# Altium PCB Rev3.PcbDoc (part 3 of 3)
Units mil, origin at the board's own origin, x right, y up, seen from the top; angles counter-clockwise.
Board outline 3350 x 2700 mil, 4 copper layers (Top Layer, GND, VCC, Bottom Layer), stack 23.756 mil thick; 157 components, 90 nets, 509 pads, 166 vias.
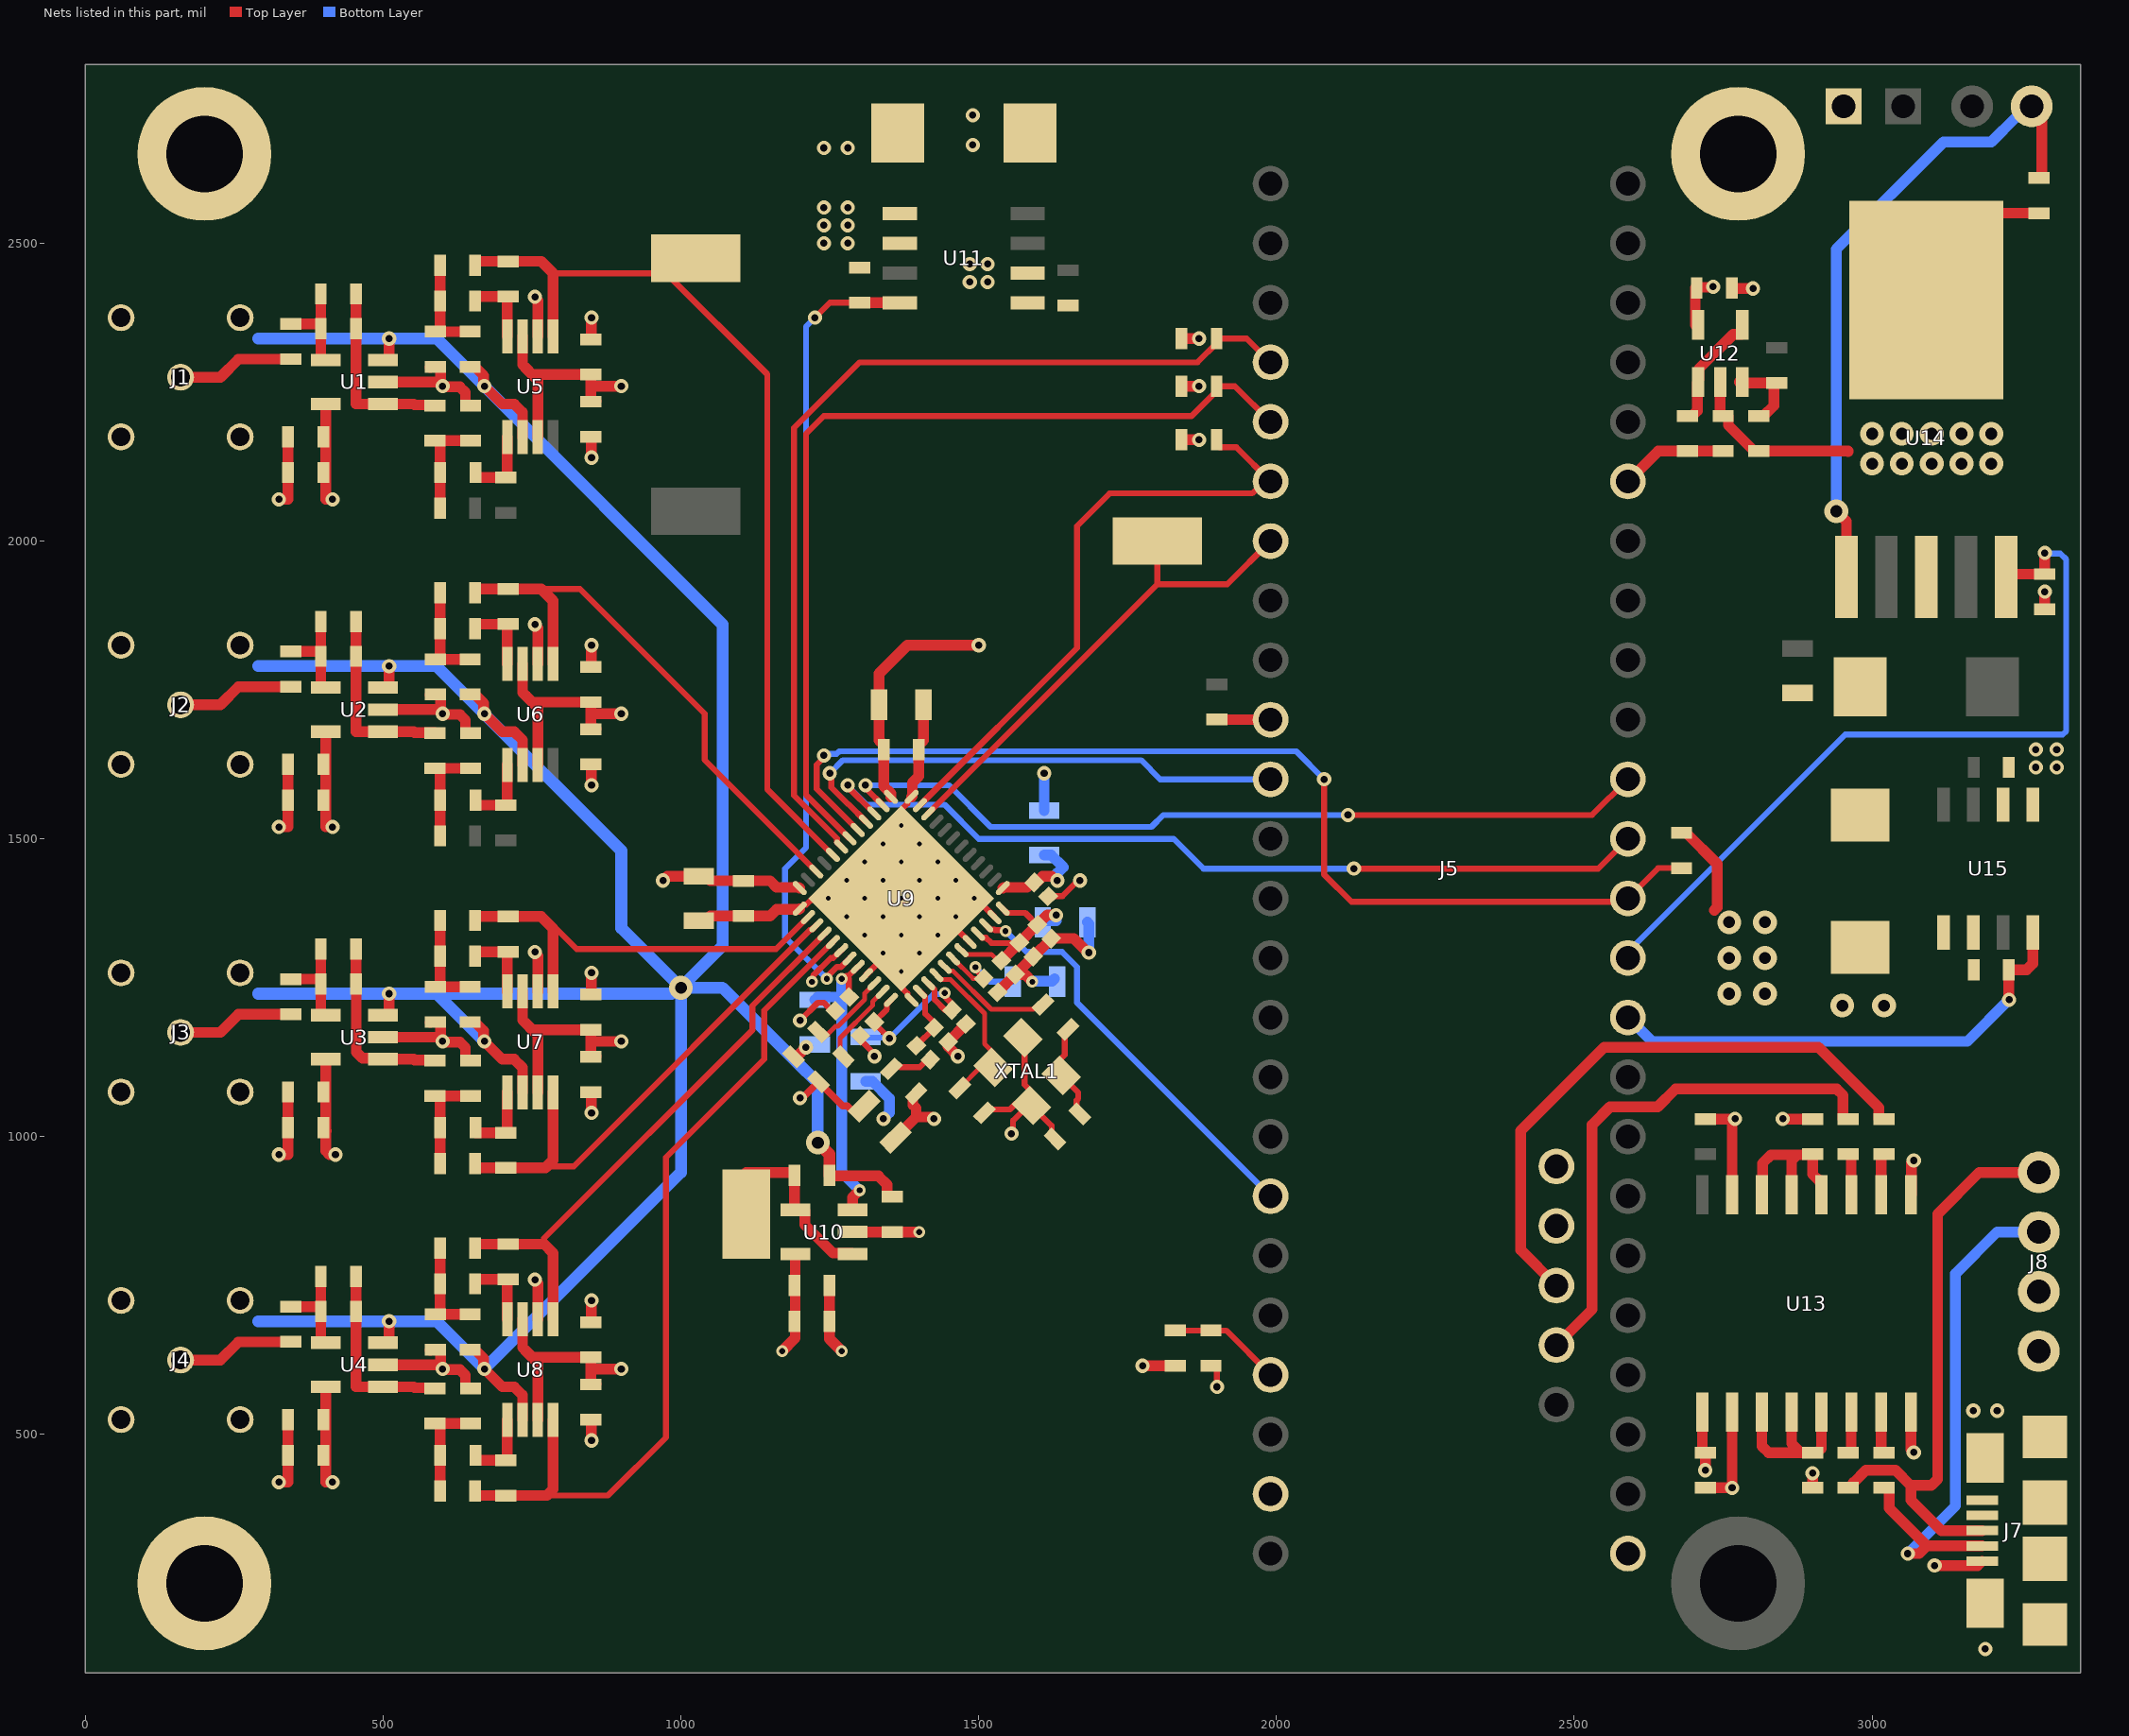
[diagram p4: the nets of this part, all layers, seen from the top]

## Via types
v1: diameter 24, hole 12, Top Layer to Bottom Layer, tented both sides, 101 vias
v2: diameter 40, hole 20, Top Layer to Bottom Layer, tented both sides, 29 vias
v3: diameter 19.68, hole 7.87, Top Layer to Bottom Layer, 25 vias
v4: diameter 20, hole 10, Top Layer to Bottom Layer, tented both sides, 11 vias

## Nets (pads, with @x,y where several pads share a name; then routed paths per layer and width w, separated by ;. In a path a pad name is that pad's centre, name@x,y a point inside that pad or via, vN(x,y) a via of type N, cw(c..) or ccw(c..) an arc to the next point about the centre after c; other vN are vias at no path point) (continued)
AINN3: C21.2 R27.2 U7.4 U9.3 | length 877.2
  Top Layer w10: 775,950 820,950 1217.91,1347.91 1220.48,1347.91 U9.3@1227.33,1354.76
  Top Layer w18: C21.2@654.53,955 654.53,948.31 655.37,947.47 R27.2@706,947.47 772.47,947.47 775,950 785.39,960.39 U7.4@785.39,1074.35
AINN4: C24.2 R28.2 U8.4 U9.5 | length 1447.1
  Top Layer w10: 774.84,397.47 877.47,397.47 975,495 975,965 1140,1130 1140,1211.76 U9.5@1255.16,1326.92
  Top Layer w18: C24.2@654.53,405 654.53,398.31 655.37,397.47 R28.2@706,397.47 774.84,397.47 785.39,408.02 U8.4@785.39,524.35
AINN_BUS1: C13.1 R29.1 TP1.1 U5.5 U9.44 | length 1533.5
  Top Layer w10: 785.39,2449.61 975.39,2449.61 1145,2280 1145,1583.24 U9.44@1255.16,1473.08
  Top Layer w18: C13.1@654.53,2463 654.53,2468.69 655.37,2469.53 R29.1@710,2469.53 765.47,2469.53 785.39,2449.61 U5.5@785.39,2343.65
AINN_BUS2: C16.1 R30.1 U6.5 U9.46 | length 954.8
  Top Layer w10: 765.47,1919.53 830.47,1919.53 1040,1710 1040,1632.56 U9.46@1227.33,1445.24
  Top Layer w18: C16.1@654.53,1913 654.53,1918.69 655.37,1919.53 R30.1@710,1919.53 765.47,1919.53 785.39,1899.61 U6.5@785.39,1793.65
AINN_BUS3: C19.1 R31.1 U7.5 U9.2 | length 732.5
  Top Layer w10: 775,1365 825,1315 1159.73,1315 U9.2@1213.41,1368.68
  Top Layer w18: C19.1@654.53,1363 654.53,1368.69 655.37,1369.53 R31.1@710,1369.53 765.47,1369.53 785.39,1349.61 U7.5@785.39,1243.65
AINN_BUS4: C22.1 R32.1 U8.5 U9.4 | length 970.4
  Top Layer w10: 770.47,819.53 770.47,829.47 1120,1179 1120,1219.6 U9.4@1241.25,1340.84
  Top Layer w18: C22.1@654.53,813 654.53,818.69 655.37,819.53 R32.1@710,819.53 770.47,819.53 785.39,804.61 U8.5@785.39,693.65
AVDD: C2.1 C3.2 C5.1 C6.2 C8.1 C9.2 C11.1 C12.2 C29.2 C30.1 C31.2 C32.1 C33.2 C34.1 C35.2 C36.1 C37.2 C38.1 C40.1 C41.1 C42.2 C44.2 C45.1 C47.2 C52.2 C74.2 R34.2 U1.5 U2.5 U3.5 U4.5 U5.3 U5.7 U6.3 U6.7 U7.3 U7.7 U8.3 U8.7 U9.6 U9.12 U9.15 U9.48 U10.5 U11.5 U11.6 | length 3301.8
  Top Layer w10: v4(1220,1260) 1221.91,1261.91 1221.91,1270.2 1251.72,1300 1255.97,1300 1268.97,1313 U9.6@1269.08,1313 ; v1(1350,1165) 1324.69,1190.31 C45.1@1324.69,1192.69 1345.75,1213.75 1345.75,1222.64 U9.12@1352.6,1229.49 ; U9.15@1415.24,1257.33 1415.24,1257.21 1426,1246.45 1426,1230 1443.31,1212.69 1444.84,1212.69 1445.4,1212.14 1454.75,1212.14 C52.2@1455.31,1212.69 1455.86,1213.25 1455.86,1222.6 1444.91,1233.55 1444.91,1239.09 v4(1443,1241)
  Top Layer w12: v1(1200,1065) 1204,1065 C42.2@1231.12,1092.12 1271.79,1051.45 1279.85,1051.45 1288.2,1043.1 1299.2,1043.1 C44.2@1307.55,1051.45
  Top Layer w18: C9.2@399.53,1015 C9.2@405,1009.53 ; U4.5@403.53,580 403.53,420 v1(415,420) ; C9.2@403.53,1015 403.53,1075 403.53,1095 ; U3.5@403.53,1130 403.53,1095 ; U2.5@403.53,1680 403.53,1520 v1(415,1520) ; U1.5@403.53,2230 403.53,2070 v1(415,2070) ; v1(420,970) 410,970 403.53,976.47 403.53,1095 ; U8.7@734.2,693.65 734.2,645.8 740.02,639.98 750.53,629.47 ; U7.7@734.2,1243.65 734.2,1195.8 740.02,1189.98 750.53,1179.47 ; U6.7@734.2,1793.65 734.2,1745.8 740.02,1739.98 750.53,1729.47 ; U5.7@734.2,2343.65 734.2,2295.8 740.02,2289.98 750.53,2279.47 ; U8.3@759.8,524.35 759.8,620.2 750.53,629.47 ; U7.3@759.8,1074.35 759.8,1170.2 750.53,1179.47 ; U6.3@759.8,1624.35 759.8,1720.2 750.53,1729.47 ; U5.3@759.8,2174.35 759.8,2270.2 750.53,2279.47 ; C36.1@857.72,584.84 856.87,584 C36.1@849,584 849,606.74 ; C34.1@857.72,1134.84 856.87,1134 C34.1@849,1134 849,1156.74 ; C32.1@857.72,1684.84 856.87,1684 C32.1@849,1684 849,1706.74 ; C30.1@857.72,2234.84 856.87,2234 C30.1@849,2234 849,2256.74 ; v1(900,610) 852.26,610 849,606.74 ; v1(900,1160) 852.26,1160 849,1156.74 ; v1(900,1710) 852.26,1710 849,1706.74 ; v1(900,2260) 852.26,2260 849,2256.74 ; v1(970,1430) 977.4,1437.4 C37.2@1030,1437.4 1041.81,1437.4 1049.68,1429.53 C38.1@1105,1429.53 1149.72,1429.53 1160.65,1418.59 1198.3,1418.59 U9.48@1199.49,1417.4 ; v4(1170,640) 1192,662 U10.5@1192,803 ; 750.53,629.47 C35.2@849,629.47 849,606.74 ; 750.53,1179.47 C33.2@849,1179.47 849,1156.74 ; 750.53,1729.47 C31.2@849,1729.47 849,1706.74 ; 750.53,2279.47 C29.2@849,2279.47 849,2256.74
  Bottom Layer w10: C74.2@1310,1167.4 1311.2,1166.2 1348.8,1166.2 v1(1350,1165) 1424.09,1239.09 1441.09,1239.09 v4(1443,1241)
  other v1: 1240,2500 1280,2500 1240,2530 1280,2530 1240,2560 1280,2560 1240,2660 1280,2660
AVDD_PG: R34.1 U9.7 U11.8 | length 1366.9
  Top Layer w10: v1(1225,2375) 1250,2400 R34.1@1300,2400 ; v4(1245,1265) 1246.91,1266.91 1246.91,1270.2 1261.72,1285 1268.81,1285 1282.89,1299.08 U9.7@1283,1299.08
  Top Layer w18: R34.1@1300,2400 U11.8@1367.75,2400
  Bottom Layer w10: v1(1225,2375) 1210,2360 1210,1485 1175,1450 1175,1335 v4(1245,1265)
BIASN: C39.1 U9.10 | length 138.6
  Top Layer w8: C39.1@1230.88,1175.88 1236.45,1170.31 1244.71,1170.31 1259.4,1185 1263.27,1185 1308.67,1230.41 1308.67,1240.74 1324.76,1256.83 U9.10@1324.76,1257.33
BIASP: C42.1 U9.11 | length 141.4
  Top Layer w8: C42.1@1272.88,1133.88 1267.31,1139.45 1267.31,1165.58 1321.67,1219.94 1321.67,1226.4 U9.11@1338.68,1243.41
CM: C43.2 C75.2 U9.8 U10.3 | length 520.5
  Top Layer w10: v4(1270,1265) 1272.71,1265 1277.97,1270.27 1282.14,1270.27 1296.92,1285.05 U9.8@1296.92,1285.16 ; 1282.14,1265 1282.14,1235.25 C43.2@1282.69,1234.69
  Top Layer w18: U10.3@1288,877 1288,898 v4(1300,910)
  Bottom Layer w18: C75.2@1225,1229.8 1229.78,1234.58 1264.58,1234.58 1270,1240 ; v4(1270,1265) 1270,1240 ; v4(1300,910) 1270,940 1270,1240
CM_buffered: R33.1 TP3.1 U10.1 U10.4 | length 284
  Top Layer w18: TP3.1@1110,940 1189.63,940 1190.47,939.16 R33.1@1190.47,935 1190.47,878.5 U10.4@1192,877 ; U10.4@1192,877 1206.5,877 1208,875.5 1208,852 1255.5,804.5 1286.5,804.5 U10.1@1288,803
DATA_READY: J5.42 U9.22 | length 700.8
  Top Layer w10: U9.22@1512.67,1354.76 1519.52,1347.91 1526.26,1347.91 1527.37,1346.8 1543.2,1346.8 v4(1545,1345)
  Bottom Layer w10: v4(1545,1345) 1580,1310 1640,1310 1665,1285 1665,1225 J5.42@1990,900
DD+: R48.1 U13.10 | length 72.5
  Top Layer w18: U13.10@3015,902.5 3015,969.63 3015.84,970.47 R48.1@3020,970.47
DD+_T: J5.51 R48.2 | length 1013.5
  Top Layer w18: J5.51@2469.92,750 2410,809.92 2410,1010 2550,1150 2910,1150 3011.28,1048.72 3011.28,1030.37 3012.13,1029.53 R48.2@3020,1029.53
DD-: R46.1 U13.11 | length 72.5
  Top Layer w18: R46.1@2960,970.47 2964.16,970.47 2965,969.63 U13.11@2965,902.5
DD-_T: J5.52 R46.2 | length 893.5
  Top Layer w18: J5.52@2469.92,650 2530,710.08 2530,1020 2560,1050 2640,1050 2670,1080 2940.74,1080 2951.28,1069.46 2951.28,1030.37 2952.13,1029.53 R46.2@2960,1029.53
DVDD: C46.1 C48.2 C58.2 C61.1 C68.2 C73.1 R39.2 R40.2 R42.2 R50.2 R52.2 RT1.1 U9.25 U9.37 U12.5 U15.5 U15.6 | length 942
  Top Layer w10: RT1.1@1890,615.47 1895.16,615.47 1900,610.63 v1(1900,580)
  Top Layer w18: U9.37@1352.6,1570.51 1352.6,1576.28 1340.47,1588.41 C48.2@1340.47,1650 1340.47,1657.87 1332.6,1665.75 C46.1@1332.6,1725 1332.6,1777.4 1380.2,1825 v1(1500,1825) ; U9.25@1540.51,1417.4 1541.7,1418.59 1581.51,1418.59 1589.61,1426.69 1597,1426.69 1607.41,1437.1 1622,1437.1 ; R40.2@1840.47,2170 v1(1870,2170) ; R39.2@1840.47,2260 v1(1870,2260) ; R42.2@2680,1510 2687.87,1510 2740,1457.87 2740,1385 2735,1380 ; U12.5@2703,2363 C61.1@2703,2425 ; C61.1@2705.47,2425 2705.47,2425.16 2706.31,2426 2732,2426 v1(2733,2427) ; R52.2@3290,1885.47 v1(3290,1915)
  Bottom Layer w18: C73.1@1610,1472.6 1621.81,1472.6 1641.95,1452.46 1632,1442.5 v1(1632,1430)
  other v2: 2950,1220 3020,1220 2760,1240 2820,1240 2760,1300 2820,1300 2760,1360 2820,1360
DVDD_PG: J5.10 R50.1 U15.8 | length 832.8
  Top Layer w18: v1(3230,1230) 3229.53,1230.47 R50.1@3229.53,1280 3259.46,1280 3270,1290.54 U15.8@3270,1342.75
  Bottom Layer w18: J5.10@2590,1200 2590.61,1200 2630.61,1160 3160,1160 v1(3230,1230)
EN: J6.1 R51.2 U14.1 | length 1133.5
  Top Layer w18: v2(2940,2050) 2957,2033 U14.1@2957,1940 ; R51.2@3280,2609.53 3284.16,2609.53 3285,2610.37 3285,2740 J6.1@3290,2745
  Bottom Layer w18: v2(2940,2050) 2940,2490 3120,2670 3200,2670 3241.66,2711.66 3242.59,2711.66 3260.93,2730 J6.1@3275,2730
GND: B1.- C2.2 C3.1 C5.2 C6.1 C8.2 C9.1 C11.2 C12.1 C29.1 C30.2 C31.1 C32.2 C33.1 C34.2 C35.1 C36.2 C37.1 C38.2 C39.2 C40.2 C41.2 C43.1 C44.1 C45.2 C46.2 C47.1 C48.1 C49.1 C51.1 C52.1 C53.1 C54.2 C55.1 C56.1 C57.1 C58.1 C59.1 C60.1 C61.2 C62.1 C64.1 C65.1 C66.1 C68.1 C69.1 C70.1 C71.1 C72.1 C73.2 C74.1 C75.1 J5.1 J5.34 J5.47 J5.49 J5.50 pad.53 pad.54 pad.56 R13.2 R14.2 R15.2 R16.2 R21.1 R22.1 R23.1 R24.1 R35.1 R37.1 R38.1 R41.1 R44.1 R51.1 U1.2 U2.2 U3.2 U4.2 U5.6 U6.6 U7.6 U8.6 U9.1 U9.9 U9.13 U9.20 U9.23 U9.36 U9.49 U10.2 U11.1 U11.2 U12.2 U13.9 U13.15 U14.3 U14.6 U15.1 U15.2 XTAL1.2 XTAL1.4 | length 5695.8
  Top Layer w10: U9.1@1199.49,1382.6 1206.34,1389.45 1210.62,1389.45 1221.17,1400 v3(1247.51,1400) v3(1308.75,1400) v3(1370,1400) ; v1(1200,1195) 1230,1225 1240,1225 1253.69,1211.31 C43.1@1259.31,1211.31 ; C45.2@1301.31,1169.31 1301.31,1162.48 1325,1138.79 v1(1325,1135) ; U9.9@1310.84,1271.25 U9.49@1370,1330.4 ; U9.13@1387.4,1229.49 1380.55,1236.34 1380.55,1240.62 1370,1251.17 v3(1370,1277.51) U9.49@1370,1330.4 ; U9.36@1387.4,1570.51 1380.55,1563.66 1380.55,1559.38 1370,1548.83 v3(1370,1522.49) v3(1370,1461.25) v3(1370,1400) ; U9.20@1484.84,1326.92 1484.72,1326.92 1467.11,1344.53 1425.47,1344.53 v3(1400.62,1369.38) v3(1370,1400) ; C53.1@1509.88,1040.12 1515.45,1045.69 1552.52,1045.69 1562,1055.18 XTAL1.2@1585.56,1055.18 ; U9.23@1526.59,1368.68 1495.27,1400 v3(1492.49,1400) v3(1431.25,1400) v3(1370,1400) ; v1(1555,1005) 1557.68,1007.68 1557.68,1027.3 XTAL1.2@1585.56,1055.18 ; XTAL1.4@1574.42,1166.53 1577.2,1163.75 1577.2,1087.08 1585.56,1078.73 XTAL1.2@1585.56,1055.18 ; XTAL1.2@1588.34,1052.39 1622.55,1018.18 1622.55,1001.69 C59.1@1628.12,996.12 ; C58.1@1616.69,1403.31 1617.25,1403.86 1640.74,1403.86 1666.88,1430 v1(1670,1430) ; U9.49@1370,1330.4 v3(1370,1338.75) v3(1370,1400)
  Top Layer w18: v1(325,420) 340.47,420 C11.2@340.47,525 ; v1(325,970) 340.47,970 C8.2@340.47,1075 ; v1(325,1520) 340.47,1520 C5.2@340.47,1625 ; v1(325,2070) 340.47,2070 C2.2@340.47,2175 ; U4.2@499.53,617 v1@591.38,617 ; U3.2@499.53,1167 v1@591.38,1167 ; U2.2@499.53,1717 v1@591.38,1717 ; U1.2@499.53,2267 v1@591.38,2267 ; R16.2@579.28,641.63 580.13,642.47 R16.2@588,642.47 595.87,642.47 596.72,641.63 596.72,614.91 601.15,610.48 601.15,608.85 628.89,608.85 638.28,599.46 638.28,578.37 639.13,577.53 R24.1@647,577.53 ; R15.2@579.28,1191.63 580.13,1192.47 R15.2@588,1192.47 595.87,1192.47 596.72,1191.63 596.72,1164.91 601.15,1160.48 601.15,1158.85 628.89,1158.85 638.28,1149.46 638.28,1128.37 639.13,1127.53 R23.1@647,1127.53 ; R14.2@579.28,1741.63 580.13,1742.47 R14.2@588,1742.47 595.87,1742.47 596.72,1741.63 596.72,1714.91 601.15,1710.48 601.15,1708.85 628.89,1708.85 638.28,1699.46 638.28,1678.37 639.13,1677.53 R22.1@647,1677.53 ; R13.2@579.28,2291.63 580.13,2292.47 R13.2@588,2292.47 595.87,2292.47 596.72,2291.63 596.72,2264.91 601.15,2260.48 601.15,2258.85 628.89,2258.85 638.28,2249.46 638.28,2228.37 639.13,2227.53 R21.1@647,2227.53 ; v1(755,760) 755,758.38 759.8,753.58 U8.6@759.8,693.65 ; v1(755,1310) 755,1308.38 759.8,1303.58 U7.6@759.8,1243.65 ; v1(755,1860) 755,1858.38 759.8,1853.58 U6.6@759.8,1793.65 ; v1(755,2410) 755,2408.38 759.8,2403.58 U5.6@759.8,2343.65 ; C36.2@849,524.94 849.5,524.44 849.5,490.5 v1(850,490) ; C35.1@849,688.53 849.5,689.03 849.5,724.5 v1(850,725) ; C34.2@849,1074.94 849.5,1074.44 849.5,1040.5 v1(850,1040) ; C33.1@849,1238.53 849.5,1239.03 849.5,1274.5 v1(850,1275) ; C32.2@849,1624.94 849.5,1624.44 849.5,1590.5 v1(850,1590) ; C31.1@849,1788.53 849.5,1789.03 849.5,1824.5 v1(850,1825) ; C30.2@849,2174.94 849.5,2174.44 849.5,2140.5 v1(850,2140) ; C29.1@849,2338.53 849.5,2339.03 849.5,2374.5 v1(850,2375) ; C37.1@1030,1362.6 1041.81,1362.6 1049.68,1370.47 C38.2@1105,1370.47 1149.72,1370.47 1160.65,1381.41 1198.3,1381.41 U9.1@1199.49,1382.6 ; C39.2@1189.12,1134.12 1191.03,1132.22 1192.22,1132.22 v1(1210,1150) ; C40.2@1249.53,750 C41.2@1249.53,690 1249.53,660.47 v4(1270,640) ; U10.2@1288,840 C49.1@1355,840 v4(1400,840) ; C44.1@1360.45,998.55 1394.88,1032.99 ; U9.36@1387.4,1570.51 1388.59,1571.7 1388.59,1594.35 1399.53,1605.28 C48.1@1399.53,1650 1399.53,1657.87 1407.4,1665.75 C46.2@1407.4,1725 ; R35.1@1394.88,1072.12 1389.31,1066.55 1389.31,1053.47 1394.88,1047.9 1394.88,1032.99 ; v1(1425,1030) 1422.01,1032.99 1394.88,1032.99 ; v1(1465,1135) 1448.69,1151.31 1448.69,1154.5 1448.14,1155.05 1448.14,1158.75 C51.1@1448.69,1159.31 C52.1@1478.69,1189.31 ; C54.2@1531.69,1242.31 C55.1@1561.69,1272.31 C55.1@1562.25,1272.86 ; v4(1590,1260) 1577.69,1272.31 1566.5,1272.31 1565.95,1272.86 C55.1@1562.25,1272.86 ; v1(1685,1309) 1683.38,1309 1659.51,1332.86 1622.25,1332.86 C57.1@1621.69,1332.31 C56.1@1591.69,1302.31 C55.1@1562.25,1272.86 ; v1@1775,615 1775.47,615.47 R37.1@1830,615.47 ; R38.1@1840.47,2340 v1(1870,2340) ; R41.1@1900,1700.47 1900.24,1700.24 1989.76,1700.24 J5.34@1990,1700 ; C62.1@2720,1029.53 2769.53,1029.53 2769.53,1027.9 2765,1023.38 U13.15@2765,902.5 ; U12.2@2745,2267 2745,2210.84 2745.84,2210 C64.1@2750,2210 ; C64.1@2758.72,2209.16 2758.72,2194.35 2802.13,2150.94 R44.1@2810,2150.94 2960,2150.94 2960,2150 ; C61.2@2764.53,2425 2764.53,2424.84 2765.37,2424 v1(2800,2424) ; v1(2850,1030) 2850.47,1029.53 C66.1@2900,1029.53 ; U13.9@3065,902.5 3066,903.5 3066,956 v1(3070,960) ; U14.6@3091,2404.5 3091,2430.47 3211,2550.47 R51.1@3280,2550.47
  Bottom Layer w18: C74.1@1310,1092.6 1321.81,1092.6 1350,1064.41 1350,1040 v1(1340,1030) ; v4(1590,1260) 1591.15,1261.15 1623.55,1261.15 C72.1@1627.4,1265 ; C73.2@1610,1547.4 v1(1610,1610) ; C71.1@1682.4,1360 1685,1357.4 v1@1685,1312 ; v1@1684,1313 v1@1685,1312 ; v1(1685,1309) v1@1685,1312
  other v1: 600,610 1775.24,615.24 2770,1030 600,1160 3275,1620 3310,1620 3275,1650 3310,1650 600,1710 600,2260 1485,2435 1515,2435 1485,2465 1515,2465 1490,2665 1490,2715
  other v2: 3000,2130 3050,2130 3100,2130 3150,2130 3200,2130 3000,2180 3050,2180 3100,2180 3150,2180 3200,2180
  other v3: 1339.38,1308.13 1400.62,1308.13 1308.75,1338.75 1431.25,1338.75 1278.13,1369.38 1339.38,1369.38 1461.87,1369.38 1278.13,1430.62 1339.38,1430.62 1400.62,1430.62 1461.87,1430.62 1308.75,1461.25 1431.25,1461.25 1339.38,1491.87 1400.62,1491.87
MISO_ADC: J5.14 U9.38 | length 1387.4
  Top Layer w10: v1(1310,1590) 1312.68,1587.32 1312.68,1582.6 U9.38@1338.68,1556.59 ; v1(2120,1540) 2530,1540 J5.14@2590,1600
  Bottom Layer w10: v1(1310,1590) 1450,1590 1520,1520 1790,1520 1810,1540 v1(2120,1540)
MOSI_ADC: J5.13 U9.39 | length 1455.2
  Top Layer w10: v1(1280,1590) 1280,1587.55 1324.76,1542.79 U9.39@1324.76,1542.67 ; v1(2130,1450) 2540,1450 J5.13@2590,1500
  Bottom Layer w10: v1(1280,1590) 1280,1588.89 1311.45,1557.44 1442.56,1557.44 1500,1500 1827.4,1500 1877.4,1450 v1(2130,1450)
NetC5_ANALOG1_1: C15.1 C25.1 R9.2 R21.2 | length 173.8
  Top Layer w18: R9.2@587,2168.47 R9.2@594.63,2168.47 ; C15.1@595.47,2055 595.47,2167.63 R9.2@594.63,2168.47 ; R21.2@647,2168.47 R9.2@594.63,2168.47
NetC5_ANALOG2_1: C18.1 C26.1 R10.2 R22.2 | length 173.8
  Top Layer w18: R10.2@587,1618.47 R10.2@594.63,1618.47 ; C18.1@595.47,1505 595.47,1617.63 R10.2@594.63,1618.47 ; R22.2@647,1618.47 R10.2@594.63,1618.47
NetC5_ANALOG3_1: C21.1 C27.1 R11.2 R23.2 | length 173.8
  Top Layer w18: R11.2@587,1068.47 R11.2@594.63,1068.47 ; C21.1@595.47,955 595.47,1067.63 R11.2@594.63,1068.47 ; R23.2@647,1068.47 R11.2@594.63,1068.47
NetC5_ANALOG4_1: C24.1 C28.1 R12.2 R24.2 | length 173.8
  Top Layer w18: R12.2@587,518.47 R12.2@594.63,518.47 ; C24.1@595.47,405 595.47,517.63 R12.2@594.63,518.47 ; R24.2@647,518.47 R12.2@594.63,518.47
NetC6_ANALOG1_1: C1.1 R1.2 R5.1 U1.4 | length 169.5
  Top Layer w18: R1.2@345,2364.53 R5.1@395.47,2364.53 ; C1.1@395.47,2415 R5.1@395.47,2364.53 ; U1.4@403.53,2304 395.47,2304 R5.1@395.47,2356.51 R5.1@395.47,2364.53
NetC6_ANALOG1_2: C1.2 R5.2 R9.1 U1.1 | length 318.5
  Top Layer w18: C1.2@454.53,2415 R5.2@454.53,2356.51 454.53,2230 U1.1@499.53,2230 551.53,2230 553.16,2228.37 586.16,2228.37 R9.1@587,2227.53
NetC6_ANALOG2_1: C4.1 R2.2 R6.1 U2.4 | length 169.5
  Top Layer w18: R2.2@345,1814.53 R6.1@395.47,1814.53 ; C4.1@395.47,1865 R6.1@395.47,1814.53 ; U2.4@403.53,1754 395.47,1754 R6.1@395.47,1806.51 R6.1@395.47,1814.53
NetC6_ANALOG2_2: C4.2 R6.2 R10.1 U2.1 | length 318.5
  Top Layer w18: C4.2@454.53,1865 R6.2@454.53,1806.51 454.53,1680 U2.1@499.53,1680 551.53,1680 553.16,1678.37 586.16,1678.37 R10.1@587,1677.53
NetC6_ANALOG3_1: C7.1 R3.2 R7.1 U3.4 | length 169.5
  Top Layer w18: R3.2@345,1264.53 R7.1@395.47,1264.53 ; C7.1@395.47,1315 R7.1@395.47,1264.53 ; U3.4@403.53,1204 395.47,1204 R7.1@395.47,1256.51 R7.1@395.47,1264.53
NetC6_ANALOG3_2: C7.2 R7.2 R11.1 U3.1 | length 311.2
  Top Layer w18: C7.2@454.53,1315 R7.2@454.53,1256.51 455,1256.04 455,1142.04 465.54,1131.5 498.03,1131.5 U3.1@499.53,1130 551.53,1130 553.16,1128.37 586.16,1128.37 R11.1@587,1127.53
NetC6_ANALOG4_1: C10.1 R4.2 R8.1 U4.4 | length 169.5
  Top Layer w18: R4.2@345,714.53 R8.1@395.47,714.53 ; C10.1@395.47,765 R8.1@395.47,714.53 ; U4.4@403.53,654 395.47,654 R8.1@395.47,706.51 R8.1@395.47,714.53
NetC6_ANALOG4_2: C10.2 R8.2 R12.1 U4.1 | length 318.5
  Top Layer w18: C10.2@454.53,765 R8.2@454.53,706.51 454.53,580 U4.1@499.53,580 551.53,580 553.16,578.37 586.16,578.37 R12.1@587,577.53
NetC7_ANALOG1_2: C25.2 R25.1 U5.1 | length 128.9
  Top Layer w18: C25.2@655,2115 655,2107.37 655.84,2106.53 R25.1@706,2106.53 707.77,2106.53 708.61,2107.37 U5.1@708.61,2174.35
NetC7_ANALOG2_2: C26.2 R26.1 U6.1 | length 128.9
  Top Layer w18: C26.2@655,1565 655,1557.37 655.84,1556.53 R26.1@706,1556.53 707.77,1556.53 708.61,1557.37 U6.1@708.61,1624.35
NetC7_ANALOG3_2: C27.2 R27.1 U7.1 | length 128.9
  Top Layer w18: C27.2@655,1015 655,1007.37 655.84,1006.53 R27.1@706,1006.53 707.77,1006.53 708.61,1007.37 U7.1@708.61,1074.35
NetC7_ANALOG4_2: C28.2 R28.1 U8.1 | length 128.9
  Top Layer w18: C28.2@655,465 655,457.37 655.84,456.53 R28.1@706,456.53 707.77,456.53 708.61,457.37 U8.1@708.61,524.35
NetC8_ANALOG1_1: C13.2 C14.1 R13.1 R17.2 | length 176.5
  Top Layer w18: C13.2@595.47,2463 595.47,2352.37 594.63,2351.53 R13.1@588,2351.53 R17.2@646,2351.53
NetC8_ANALOG1_2: C14.2 R29.2 U5.8 | length 129.6
  Top Layer w18: C14.2@654.53,2403 654.53,2409.63 655.37,2410.47 R29.2@709.46,2410.47 ; U5.8@708.61,2343.65 708.61,2409.63 R29.2@709.46,2410.47 ; R29.2@710,2410.47 R29.2@709.46,2410.47
NetC8_ANALOG2_1: C16.2 C17.1 R14.1 R18.2 | length 176.5
  Top Layer w18: C16.2@595.47,1913 595.47,1802.37 594.63,1801.53 R14.1@588,1801.53 R18.2@646,1801.53
NetC8_ANALOG2_2: C17.2 R30.2 U6.8 | length 129.6
  Top Layer w18: C17.2@654.53,1853 654.53,1859.63 655.37,1860.47 R30.2@709.46,1860.47 ; U6.8@708.61,1793.65 708.61,1859.63 R30.2@709.46,1860.47 ; R30.2@710,1860.47 R30.2@709.46,1860.47
NetC8_ANALOG3_1: C19.2 C20.1 R15.1 R19.2 | length 176.5
  Top Layer w18: C19.2@595.47,1363 595.47,1252.37 594.63,1251.53 R15.1@588,1251.53 R19.2@646,1251.53
NetC8_ANALOG3_2: C20.2 R31.2 U7.8 | length 129.6
  Top Layer w18: C20.2@654.53,1303 654.53,1309.63 655.37,1310.47 R31.2@709.46,1310.47 ; U7.8@708.61,1243.65 708.61,1309.63 R31.2@709.46,1310.47 ; R31.2@710,1310.47 R31.2@709.46,1310.47
NetC8_ANALOG4_1: C22.2 C23.1 R16.1 R20.2 | length 176.5
  Top Layer w18: C22.2@595.47,813 595.47,702.37 594.63,701.53 R16.1@588,701.53 R20.2@646,701.53
NetC8_ANALOG4_2: C23.2 R32.2 U8.8 | length 129.6
  Top Layer w18: C23.2@654.53,753 654.53,759.63 655.37,760.47 R32.2@709.46,760.47 ; U8.8@708.61,693.65 708.61,759.63 R32.2@709.46,760.47 ; R32.2@710,760.47 R32.2@709.46,760.47
NetC17_2: C54.1 C72.2 U9.18 | length 162.5
  Top Layer w6: v4@1494.54,1279.46 v4(1494.54,1284.46) ; C54.1@1495.57,1265.14 1507.75,1265.14 C54.1@1508.31,1265.69
  Top Layer w8: U9.18@1457,1299.08 1490.39,1265.69 1495.01,1265.69 C54.1@1495.57,1265.14 ; v4@1494.54,1279.46 C54.1@1508.31,1265.69
  Bottom Layer w10: v4(1494.54,1284.46) 1518.66,1260.34 C72.2@1556.96,1260.34
NetC26_1: C50.1 R35.2 | length 74.3
  Top Layer w10: R35.2@1353.12,1113.88 1358.69,1119.45 1365.54,1119.45 1368.32,1116.66 1400.87,1116.66 1413.51,1129.31 C50.1@1418.69,1129.31
NetC41_2: C59.2 R36.1 XTAL1.3 | length 164.7
  Top Layer w10: R36.1@1649.88,1180.12 1644.31,1174.55 1644.31,1137.48 1635.67,1128.84 1635.67,1105.29 1667.15,1073.8 1667.15,1063.8 1664.31,1060.96 1664.31,1043.45 C59.2@1669.88,1037.88
NetC44_2: C66.2 U13.12 U13.13 U13.14 | length 290.7
  Top Layer w18: U13.14@2815,902.5 2816,903.5 2816,955.09 2830.54,969.63 2874.7,969.63 ; U13.13@2865,902.5 2865,959.93 2874.7,969.63 ; U13.12@2915,902.5 2915,925.5 2914,926.5 2910.54,926.5 2900,937.04 C66.2@2900,970.47 2899.16,969.63 2874.7,969.63
NetJ1_ANALOG1_1: J1.1 R1.1 | length 197.6
  Top Layer w18: J1.1@160,2275 226.71,2275 257.18,2305.47 R1.1@345,2305.47
NetJ1_ANALOG2_1: J2.1 R2.1 | length 197.6
  Top Layer w18: J2.1@160,1725 226.71,1725 257.18,1755.47 R2.1@345,1755.47
NetJ1_ANALOG3_1: J3.1 R3.1 | length 197.6
  Top Layer w18: J3.1@160,1175 226.71,1175 257.18,1205.47 R3.1@345,1205.47
NetJ1_ANALOG4_1: J4.1 R4.1 | length 197.6
  Top Layer w18: J4.1@160,625 226.71,625 257.18,655.47 R4.1@345,655.47
NetR18_1: R43.1 U12.1 U12.4 | length 198.5
  Top Layer w18: R43.1@2690,2210 2697.87,2210 2706.5,2218.63 2706.5,2265.5 U12.1@2708,2267 ; U12.1@2709.5,2271.5 2709.5,2289.5 2767,2347 2780.5,2347 2782,2348.5 U12.4@2782,2363
NetR19_2: R44.2 R45.2 U12.3 | length 129.1
  Top Layer w18: U12.3@2777,2266.97 2778.5,2265.47 2835,2265.47 2835,2227.13 2817.87,2210 R44.2@2810,2210
PLLFILT: C50.2 C51.2 U9.14 | length 113.1
  Top Layer w10: C50.2@1395.31,1152.69 C51.2@1425.31,1182.69 1425.31,1190.98 1410.14,1206.15 1410.14,1234.59 U9.14@1401.32,1243.41
SCLK_ADC: J5.31 TP4.1 U9.34 | length 836.8
  Top Layer w10: U9.34@1415.24,1542.67 1800,1927.44 ; TP4.1@1800,2000 1800,1927.44 ; J5.31@1990,2000 1917.44,1927.44 1800,1927.44
SPI_CLK: J5.35 U9.40 | length 869.2
  Top Layer w10: v1(1250,1610) 1252.68,1607.32 1252.68,1586.21 1280.64,1558.25 1281.35,1558.25 U9.40@1310.84,1528.75
  Bottom Layer w10: v1(1250,1610) 1272,1632 1772.68,1632 1804.68,1600 J5.35@1990,1600
SPI_CS: J5.12 R42.1 U9.41 | length 1823.6
  Top Layer w10: v1(1240,1640) 1240,1636.21 1228,1624.21 1228,1583.76 U9.41@1296.92,1514.84 ; v1(2080,1600) 2080,1440 2125.86,1394.14 2584.14,1394.14 J5.12@2590,1400 2640.94,1450.94 R42.1@2680,1450.94
  Bottom Layer w10: v1(1240,1640) 1242.68,1642.68 1261.47,1642.68 1265.79,1647 2033,1647 v1(2080,1600)
UD+: R49.2 U13.7 | length 70.1
  Top Layer w10: R49.2@3015,474.37 3019.84,469.53 R49.2@3020,469.53
  Top Layer w18: R49.2@3015,474.37 U13.7@3015,537.5
UD+_T: J7.2 J8.2 R49.1 | length 954.2
  Top Layer w18: R49.1@3020,410.47 3027.87,410.47 3028.72,409.63 3028.72,376.28 3092.07,312.93 ; v1(3060,300) 3079.14,300 3092.07,312.93 ; J7.2@3184.68,312.93 3092.07,312.93
  Bottom Layer w18: v1(3060,300) 3140,380 3140,770 3210,840 J8.2@3300,840
UD-: R47.2 U13.6 | length 72.5
  Top Layer w18: R47.2@2960,469.53 2964.16,469.53 2965,470.37 U13.6@2965,537.5
UD-_T: J7.3 J8.1 R47.1 | length 1011.3
  Top Layer w18: R47.1@2960,410.47 2967.87,410.47 2968.72,411.31 2968.72,419.19 2989.53,440 3039.46,440 3065,414.46 ; J7.3@3184.68,338.52 3116.48,338.52 3065,390 3065,414.46 ; J8.1@3300,940 3180,940 3110,870 3110,425 3099.46,414.46 3065,414.46
USB_GND: C63.1 C67.1 J7.4 J7.5 J7.6 J8.3 U13.2 U13.8 | length 266.1
  Top Layer w18: C63.1@2720,410.47 v1(2765,410.47) U13.2@2765,537.5 ; C67.1@2900,410.47 v1(2900,435) ; U13.8@3065,537.5 3065,475 v1(3070,470)
  other v1: 3190,140 3170,540 3210,540
V_CM_ANALOG1: C49.2 J1.2 J2.2 J3.2 J4.2 R17.1 R18.1 R19.1 R20.1 R33.2 U1.3 U2.3 U3.3 U4.3 U5.2 U6.2 U7.2 U8.2 | length 6110.2
  Top Layer w18: U4.3@499.53,654 508.5,654 510,655.5 v1(510,690) ; U3.3@499.53,1204 U3.3@508.5,1204 ; U2.3@499.53,1754 508.5,1754 510,1755.5 v1(510,1790) ; U1.3@499.53,2304 508.5,2304 510,2305.5 v1(510,2340) ; U3.3@510,1205.5 v1(510,1240) ; R20.1@646,642.47 653.87,642.47 668.85,627.49 668.85,611.15 v1(670,610) 700,580 720,580 734.06,565.94 734.06,524.5 U8.2@734.2,524.35 ; R19.1@646,1192.47 653.87,1192.47 668.85,1177.49 668.85,1161.15 v1(670,1160) 700,1130 720,1130 734.06,1115.94 734.06,1074.5 U7.2@734.2,1074.35 ; R18.1@646,1742.47 653.87,1742.47 668.85,1727.49 668.85,1711.15 v1(670,1710) 700,1680 720,1680 734.06,1665.94 734.06,1624.5 U6.2@734.2,1624.35 ; R17.1@646,2292.47 653.87,2292.47 668.85,2277.49 668.85,2261.15 v1(670,2260) 700,2230 720,2230 734.06,2215.94 734.06,2174.5 U5.2@734.2,2174.35 ; R33.2@1249.53,934.84 1250.37,934 1331.74,934 1346.28,919.46 1346.28,899.9 1347.13,899.06 C49.2@1355,899.06
  Top Layer w20: v2(1230,990) 1249.37,970.63 1249.37,935 R33.2@1249.53,934.84
  Bottom Layer w20: 290,690 v1(510,690) 590,690 v1(670,610) 1000,940 v2(1000,1250) ; 290,1240 v1(510,1240) 590,1240 v1(670,1160) ; 290,1790 v1(510,1790) 590,1790 v1(670,1710) 900,1480 900,1350 v2(1000,1250) ; 290,2340 v1(510,2340) 590,2340 v1(670,2260) 1070,1860 1070,1320 v2(1000,1250) ; 580,1240 984.59,1240 994.59,1250 v2(1000,1250) ; v2(1230,990) 1229.64,990.36 1229.64,1090.36 1193.78,1126.22 1193.2,1126.22 1069.42,1250 v2(1000,1250)
V_DIG: C55.2 C56.2 C57.2 C71.2 U9.19 U9.21 U9.24 | length 366.6
  Top Layer w8: U9.19@1470.92,1313 1471.77,1313 1478.73,1306.04 1521.33,1306.04 1531.68,1295.69 C55.2@1538.31,1295.69
  Top Layer w10: U9.21@1505.71,1333.99 1512.23,1333.99 1521.22,1325 1567.62,1325 C56.2@1568.31,1325 ; U9.24@1540.51,1382.6 1547.36,1375.75 1578.25,1375.75 C57.2@1598.31,1355.69
  Top Layer w18: C55.2@1538.31,1295.69 1567.62,1325 C56.2@1568.31,1325.69 C57.2@1598.31,1355.69 1614.62,1372 v1(1630,1372)
  Bottom Layer w18: C71.2@1607.6,1360 1610.45,1362.85 1630.38,1362.85 1630.38,1372 v1(1630,1372)
V_MON: C64.2 J5.19 R43.2 | length 181.1
  Top Layer w18: J5.19@2590,2100 2640.94,2150.94 R43.2@2690,2150.94 C64.2@2750,2150.94
V_TEMP: J5.45 R37.2 RT1.2 | length 190.9
  Top Layer w10: R37.2@1830,674.53 RT1.2@1890,674.53 1915.47,674.53 J5.45@1990,600
VBUS_USB: C63.2 J7.1 J8.4 U13.1 | length 185.2
  Top Layer w18: U13.1@2715,537.5 2715,469.53 C63.2@2720,469.53 v1(2720,440) ; v1(3105,280) 3177.35,280 J7.1@3184.68,287.34
VDDD_USB: C67.2 U13.3 U13.4 U13.5 | length 319.2
  Top Layer w18: U13.3@2815,537.5 2815,480.54 2826.02,469.53 C67.2@2900,469.53 ; U13.4@2865,537.5 2865,485 2880,470 2899.53,470 C67.2@2900,469.53 ; U13.5@2915,537.5 2915,476.65 2907.87,469.53 C67.2@2900,469.53
XIN: C53.2 U9.16 XTAL1.1 | length 274.2
  Top Layer w8: U9.16@1429.16,1271.25 1436.47,1263.93 1452.68,1263.93 1510,1206.62 1510,1155.7 1524.31,1141.39 XTAL1.1@1524.31,1116.42 1502.66,1116.42 C53.2@1468.12,1081.88
XOUT: R36.2 U9.17 | length 197.9
  Top Layer w8: U9.17@1443.08,1285.16 1450.39,1277.85 1457.15,1277.85 1521.14,1213.86 1591.84,1213.86 1599.86,1221.88 R36.2@1608.12,1221.88
~5V_PG: J5.11 R52.1 U14.5 | length 1330.6
  Top Layer w18: U14.5@3225,1940 3229.53,1944.53 R52.1@3290,1944.53 v1(3290,1980)
  Bottom Layer w10: J5.11@2590,1300 2590,1310 2955,1675 3320,1675 3326,1681 3326,1969 3316.15,1978.85 v1@3291.15,1978.85
  Bottom Layer w18: v1(3290,1980) v1@3291.15,1978.85
~CONV_START: J5.30 R40.1 U9.35 | length 1057.8
  Top Layer w10: U9.35@1401.32,1556.59 1665,1820.27 1665,2025 1720,2080 1959.14,2080 1979.14,2100 J5.30@1990,2100 1932.72,2157.28 1904.37,2157.28 1899.53,2162.13 R40.1@1899.53,2170
~FAULT: J5.29 R39.1 U9.42 | length 1551.9
  Top Layer w10: U9.42@1283,1500.92 1283,1501.03 1210,1574.03 1210,2180 1240,2210 1857.4,2210 1899.53,2252.13 R39.1@1899.53,2260 1930,2260 J5.29@1990,2200
~RESET/PWDN: J5.28 R38.2 U9.43 | length 1619.1
  Top Layer w10: U9.43@1269.08,1487 1262.24,1493.84 1262.24,1500.58 1190,1572.82 1190,2190 1300,2300 1867.4,2300 1899.53,2332.13 R38.2@1899.53,2340 1950,2340 J5.28@1990,2300
pads on no net: J5.2 J5.3 J5.4 J5.5 J5.6 J5.7 J5.8 J5.9 J5.15 J5.16 J5.17 J5.18 J5.20 J5.21 J5.22 J5.23 J5.24 J5.25 J5.26 J5.27 J5.43 J5.44 J5.46 U11.7 U15.7

## Polygon pours and split planes (outlines as drawn)
USB_GND on Top Layer "USB_GND_L01_P017" (solid, pour order 17): 3350,570 3130,570 3130,360 3140,350 3220,350 3230,340 3230,280 3220,270 3160,270 3150,260 3150,110 3160,100 3350,100
GND on Top Layer "GND_L01_P012" (solid, pour order 12): 3205,1670 3330,1670 3330,1550 3205,1550
5V on Top Layer "5V_L01_P007" (solid, pour order 7): 3130,2010 3130,1640 3090,1600 3090,1520 3200,1520 3200,1680 3330,1680 3330,1830 3190,1830 3190,2010
DVDD on Top Layer "DVDD_L01_P010" (solid, pour order 10): 3200,1420 2720,1420 2720,1180 3200,1180
5V on Top Layer "5V_L01_P008" (solid, pour order 8): 1620,2440 1620,2485 1545,2485 1545,2575 1750,2575 1750,2440
GND on Top Layer "GND_L01_P002" (solid, pour order 2): 1690,2410 1650,2410 1620,2440 1620,2465 1610,2475 1550,2475 1540,2485 1540,2575 1555,2590 1620,2590 1640,2610 1640,2755 1615,2780 1490,2780 1460,2750 1460,2395 1505,2350 1690,2350 1700,2360 1700,2400
AVDD on Top Layer "AVDD_L01_P001" (solid, pour order 1): 1320,2440 1320,2450 1340,2470 1410,2470 1430,2490 1430,2760 1410,2780 1220,2780 1210,2770 1210,2450 1220,2440
DVDD on VCC "DVDD_L03_P004" (solid, pour order 4): 2650,100 2650,850 3125,850 3125,1075 3350,1075 3350,2800 1475,2800 1475,1775 1400,1775 1400,100
AVDD on VCC "AVDD_L03_P003" (solid, pour order 3): 1425,2800 1425,1800 1375,1800 1375,100 0,100 0,2800
VBUS_USB on VCC "VBUS_USB_L03_P016" (solid, pour order 16): 3350,1050 3150,1050 3150,825 2675,825 2675,100 3350,100
5V on Bottom Layer "5V_L04_P026" (solid, pour order 26): 2675,1745 2675,1645 2360,1645 2360,220 1930,220 1930,340 2160,340 2160,2650 1750,2650 1750,2440 1620,2440 1620,2770 2360,2770 2360,1950 2675,1950 2675,1850 3310,1850 3310,1690 2840,1690 2840,1745
V_CM_ANALOG1 on Bottom Layer "V_CM_ANALOG1_L04_P018" (solid, pour order 18): 310,2420 310,2125 0,2125 0,2420
V_CM_ANALOG1 on Bottom Layer "V_CM_ANALOG1_L04_P024" (solid, pour order 24): 310,770 310,480 0,480 0,770
V_CM_ANALOG1 on Bottom Layer "V_CM_ANALOG1_L04_P023" (solid, pour order 23): 305,1322.23 305,1030 0,1030 0,1322.23
V_CM_ANALOG1 on Bottom Layer "V_CM_ANALOG1_L04_P022" (solid, pour order 22): 310,1870 310,1580 0,1580 0,1870
GND on GND "GND_L02_P000" (solid, pour order 0): 2650,100 2650,850 3125,850 3125,1075 3350,1075 3350,2800 0,2800 0,100
USB_GND on GND "USB_GND_L02_P013" (solid, pour order 13): 3350,1050 3150,1050 3150,825 2675,825 2675,100 3350,100

## Other copper
Top Layer:
  region net GND: 3000,2780 2900,2780 2900,2085 3055,2085 3055,1805 2920,1805 2920,1765 2835,1765 2835,1435 3085,1435 3085,1845 3125,1845 3125,2025 3225,2025 3225,2605 3000,2605
GND:
  pour cut-out: 20,2415 20,2135 300,2135 300,2415
  pour cut-out: 20,765 20,485 300,485 300,765
  pour cut-out: 20,1315 20,1035 300,1035 300,1315
  pour cut-out: 20,1865 20,1585 300,1585 300,1865
  pour cut-out: 375,675 530,675 530,565 375,565
  pour cut-out: 375,1225 530,1225 530,1115 375,1115
  pour cut-out: 375,1775 530,1775 530,1665 375,1665
  pour cut-out: 375,2325 530,2325 530,2215 375,2215
  pour cut-out: 680,1835 680,1585 815,1585 815,1835
  pour cut-out: 680,1285 680,1035 815,1035 815,1285
  pour cut-out: 680,735 680,485 815,485 815,735
  pour cut-out: 680,2385 680,2135 815,2135 815,2385
VCC:
  pour cut-out: 20,765 20,485 300,485 300,765
  pour cut-out: 20,1315 20,1035 300,1035 300,1315
  pour cut-out: 20,1865 20,1585 300,1585 300,1865
  pour cut-out: 20,2415 20,2135 300,2135 300,2415
  pour cut-out: 375,2325 530,2325 530,2215 375,2215
  pour cut-out: 375,1775 530,1775 530,1665 375,1665
  pour cut-out: 375,1225 530,1225 530,1115 375,1115
  pour cut-out: 375,675 530,675 530,565 375,565
  pour cut-out: 375,2325 530,2325 530,2215 375,2215
  pour cut-out: 680,2385 680,2135 815,2135 815,2385
  pour cut-out: 680,1835 680,1585 815,1585 815,1835
  pour cut-out: 680,1285 680,1035 815,1035 815,1285
  pour cut-out: 680,735 680,485 815,485 815,735
  pour cut-out: 375,2325 530,2325 530,2215 375,2215
  pour cut-out: 680,2385 680,2135 815,2135 815,2385

## Silkscreen, mask and mechanical layers (free items; w line width, h text height)
Top Overlay:
  lines w5: 1410,1102 1417.5,1094.5 1514,1191 ; 1507,1198 1514,1191 ; 1521,1184 1524,1181 1667,1324 1673,1318 1706,1285 1776,1355 1837.5,1416.5 ; 1523,1182 1514,1191 ; 1525,1212 1531,1206 ; 1532,1207 1658.5,1333.5 1790,1465 ; 1650,1342 1658,1334 ; 2340,1330 2540,1330
  lines w7: 2035,2325 2195,2325
  text "Hydrophones DAQ" at 355,2655 h60
  text "GND" at 2905,2635 h30
  text "9V" at 3025,2635 h30
  text "SW_EN" at 3135,2630 h30
  text "Dec 2020" at 855,2590 h50
  text "V2.0-1" at 355,2575 h50
  text "AINP1" at 930,2525 h40
  text "PWDN" at 2035,2265 h40
  text "D0" at 2035,2170 h40
  text "V_MON" at 2345,2075 h40
  text "D0" at 2035,2070 h40
  text "SCLK" at 1720,2045 h40
  text "D0" at 2035,1970 h40
  text "AINN1" at 930,1950 h40
  text "D0" at 2035,1870 h40
  text "B" at 1130,1790 h525
  text "D0" at 2035,1775 h40
  text "GND" at 2035,1675 h40
  text "SPI_CLK" at 2035,1570 h40
  text "MISO" at 2390,1570 h40
  text "MOSI" at 2390,1475 h40
  text "D0" at 2035,1470 h40
  text "D0" at 2035,1375 h40
  text "CS" at 2460,1370 h40
  text "C54-57" at 1658,1338 h30 r45
  text "C50-52" at 1705,1289 h30 r45
  text "D0" at 2035,1270 h40
  text "5V_PG" at 2340,1265 h40
  text "D0" at 2035,1170 h40
  text "DVDD_PG" at 2265,1165 h40
  text "D0" at 2035,1075 h40
  text "D0" at 2035,970 h40
  text "VCM" at 1010,950 h40 r270
  text "D-" at 3150,915 h40
  text "D_Ready" at 2030,860 h40
  text "D+" at 3150,810 h40
  text "GND" at 3120,715 h35
  text "V+" at 3140,610 h40
  text "V_Temp" at 2030,560 h40
  text "GND" at 2030,370 h40
  text "5V" at 2035,275 h40
  text "GND" at 2430,275 h40
  text "D" at 1205,170 h600
  text "Seth Isaacson / Caleb Norfleet" at 375,125 h50
Bottom Overlay:
  text "B" at 1410,1725 h1000
  text "D" at 1355,190 h1000

## Text inside footprints (layer, text, board x,y; h text height)
U11: Top Overlay "*" at 1604.75,2383 h50 r180; Mechanical 13 "*" at 1551,2429.5 h50 r180
U13: Top Overlay "*" at 2700,515 h50 r90; Mechanical 13 "*" at 2736.5,573 h50 r90
U14: Top Overlay "*" at 2886,1915 h50; Mechanical 13 "*" at 2944.5,2068 h50
U15: Top Overlay "*" at 3287,1579.75 h50 r270; Mechanical 13 "*" at 3240.5,1526 h50 r270